# Altium PCB PCB_Yagmur-Sensoru_2025-10-18.pcbdoc
Units mil, origin at the board's own origin, x right, y up, seen from the top; angles counter-clockwise.
Board outline 1548 x 1517 mil, 2 copper layers (Top Layer, Bottom Layer); 8 components, 9 nets, 19 pads, 2 vias.
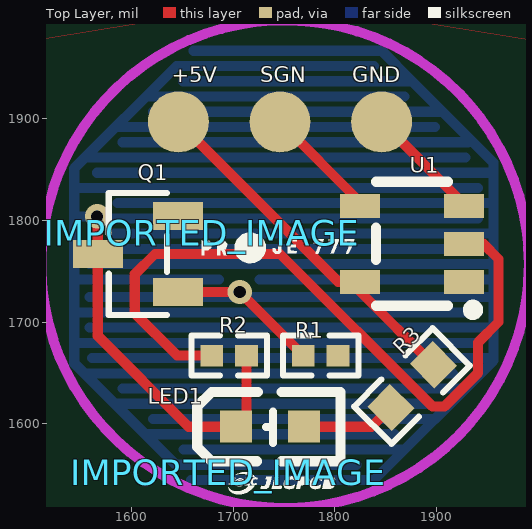
[diagram p0: Top Layer view]
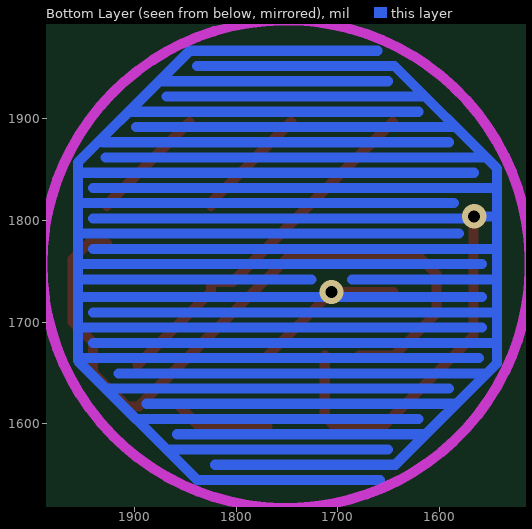
[diagram p1: Bottom Layer view, seen from below]

## Layer stack, top to bottom
Top Layer: signal copper (thickness not stored)
Dielectric: dielectric 12.6, FR-4, Dk 4.8
Bottom Layer: signal copper (thickness not stored)

## Board outline
2548,1000 1000,1000 1000,2517 2548,2517

## Components (designator, comment, footprint, x,y, rotation, side; value= is the part's Value field where it differs from the comment)
IMPORTED_IMAGE "IMPORTED_IMAGE" IMPORTED_IMAGE 1668.94,1787.89 r0 top
IMPORTED_IMAGE "IMPORTED_IMAGE" IMPORTED_IMAGE 1695.18,1552.28 r0 top
LED1 "19-217/BHC-ZL1M2RY/3T" LED0603-R-RD_BLUE 1736,1597 r0 top
Q1 "2N7002" SOT-23-3_L2.9-W1.3-P1.90-LS2.4-BR 1606,1767 r0 top
R1 "10kΩ" R0402 1786,1667 r180 top
R2 "1kΩ" R0402 1696,1667 r0 top
R3 "430Ω" R0603 1876,1637 r45 top
U1 "SN74AHC1G04DBVR" SOT-23-5_L3.0-W1.7-P0.95-LS2.8-BR 1876,1777 r0 top

## Footprints (in the part's own frame and the unit in brackets; to place one, negate y for a bottom-side part, rotate by r counter-clockwise, add the part's x,y. Pads: shape width x height; smd on the part's side, far side on the other; paste and mask are expansions set on the pad)
IMPORTED_IMAGE [mil]
  silkscreen extent 0,-30 150,0
LED0603-R-RD_BLUE [mm]
  rect 0.8x0.8 smd paste+0 mask+0.051: 1(0.851,0) 2(-0.851,0)
  silkscreen extent -1.82,-0.86 1.77,0.86
R0402 [mm]
  rect 0.566x0.54 smd paste-100 mask+0.051: 1(-0.433,0) 2(0.433,0)
  silkscreen extent -0.94,-0.5 0.94,0.5
R0603 [mil]
  rect 31.75x34.02 smd paste-3937.01 mask+2: 1(-29.65,0) 2(29.65,0)
  silkscreen extent -55,-26 55,26
SOT-23-3_L2.9-W1.3-P1.90-LS2.4-BR [mm]
  rect 1.25x0.7 smd paste+0 mask+0.051: 1(1,-0.95) 2(1,0.95) 3(-1,0)
  silkscreen extent -0.73,-1.53 0.73,1.53
SOT-23-5_L3.0-W1.7-P0.95-LS2.8-BR [mm]
  rect 1x0.6 smd paste+0 mask+0.051: 1(1.3,-0.95) 2(1.3,0) 3(1.3,0.95) 4(-1.3,0.95) 5(-1.3,-0.95)
  silkscreen extent -0.9,-1.78 1.65,1.55

## Free pads (board coordinates)
  round 60 smd paste+4 mask+4: 1(1646,1897) 2(1746,1897) 2(1846,1897)

## Via types
v1: diameter 24, hole 12, Top Layer to Bottom Layer, tented both sides, 2 vias

## Nets (pads, with @x,y where several pads share a name; then routed paths per layer and width w, separated by ;. In a path a pad name is that pad's centre, name@x,y a point inside that pad or via, vN(x,y) a via of type N, cw(c..) or ccw(c..) an arc to the next point about the centre after c; other vN are vias at no path point)
+5V: pad.1 R3.2 U1.5 | length 355.5
  Top Layer w10: pad.1 1803.4,1739.6 U1.5 1824.82,1730.13 R3.2
GND: pad.2@1846,1897 Q1.2 R1.1 U1.3 | length 116.2
  Top Layer w10: pad.2@1846,1897 1927.18,1815.82 U1.3
LED1_1: LED1.1 R3.1 | length 93.4
  Top Layer w10: LED1.1 1836,1597 R3.1
Q1_1: Q1.1 R1.2 | length 5667
  Top Layer w10: Q1.1 v1(1706.36,1729.6) R1.2
  Bottom Layer w10: 1558.5,1694.5 1956,1694.5 ; 1558.5,1724.5 1956,1724.5 1956,1857 1876,1937 ; 1558.5,1757 1956,1757 ; 1561,1664.5 1956,1664.5 ; 1566,1847 1955,1847 ; 1581,1787 1956,1787 ; 1586,1817 1956,1817 ; 1591,1634.5 1926,1634.5 ; 1591,1877 1931,1877 ; 1621,1604.5 1896,1604.5 ; 1621,1907 1904.69,1907 ; 1650.6,1937 1876,1937 ; 1651,1574.5 1866,1574.5 ; 1658.5,1544.5 1838.5,1544.5 1956,1662 1956,1729.6 ; 1661,1967 1846,1967 1876,1937 ; v1@1706.4,1724.5 v1(1706.36,1729.6) ; 1726,1742 1956,1742
Q1_3: LED1.2 Q1.3 R2.2 | length 5190
  Top Layer w10: v1(1566,1804) 1566.63,1803.37 Q1.3 ; Q1.3 1566.6,1686.4 1656,1597 LED1.2 1713.04,1607.54 R2.2
  Bottom Layer w10: 1543.5,1679.5 1941,1679.5 ; 1543.5,1709.5 1941,1709.5 ; 1546,1742 1686,1742 ; 1546,1772 1941,1772 ; 1546,1832 1941,1832 ; 1553.5,1649.5 1916,1649.5 ; 1556,1862 1928.5,1862 ; v1@1566,1802 1941,1802 ; v1(1566,1804) 1543.5,1804 ; 1586,1619.5 1888.5,1619.5 ; 1586,1892 1898.5,1892 ; 1608.43,1916.13 1614.3,1922 1868.5,1922 ; 1616,1589.5 1858.5,1589.5 ; 1821,1559.5 1643.5,1559.5 1543.5,1659.5 1543.5,1804 ; 1838.5,1952 1644.3,1952 1543.5,1851.2 1543.5,1804
S$623: 
SIGNAL: pad.2@1746,1897 U1.4 | length 115.2
  Top Layer w10: pad.2@1746,1897 1824.82,1818.18 U1.4
U1_1: U1.1
U1_2: R2.1 U1.2 | length 713.9
  Top Layer w10: R2.1 1644.8,1667 1603,1708.8 1603,1747 1623,1767 1746,1767 1896,1617 1908,1617 1941,1650 1941,1680 1961,1700 1961,1762 1946,1777 U1.2

## Polygon pours and split planes (outlines as drawn)
GND on Top Layer (solid): 1990,1978 1748.5,2017 1509,1978 1500,1969 1500,1530 1530,1500 2027,1500 2048,1521

## Keep-outs
Keep-Out Layer:
  circle w10 net S$623: c1751,1757 r240

## Silkscreen, mask and mechanical layers (free items; w line width, h text height)
Top Overlay:
  text "+5V" at 1639.7,1935.96 h15
  text "SGN" at 1726.32,1935.96 h15
  text "GND" at 1816.87,1935.96 h15
Bottom Solder:
  lines w10 net Q1_1: 1558.48,1694.44 1955.98,1694.44 ; 1558.48,1724.44 1955.98,1724.44 1955.98,1856.94 1875.98,1936.94 ; 1558.48,1756.94 1955.98,1756.94 ; 1560.98,1664.44 1955.98,1664.44 ; 1565.98,1846.94 1954.98,1846.94 ; 1580.98,1786.94 1955.98,1786.94 ; 1585.98,1816.94 1955.98,1816.94 ; 1590.98,1634.44 1925.98,1634.44 ; 1590.98,1876.94 1930.98,1876.94 ; 1620.98,1604.44 1895.98,1604.44 ; 1620.98,1906.94 1904.67,1906.94 ; 1650.59,1936.94 1875.98,1936.94 ; 1650.98,1574.44 1865.98,1574.44 ; 1658.48,1544.44 1838.48,1544.44 1955.98,1661.94 1955.98,1729.54 ; 1660.98,1966.94 1845.98,1966.94 1875.98,1936.94 ; 1706.38,1724.44 1706.38,1729.54 ; 1725.98,1741.94 1955.98,1741.94
  lines w10 net Q1_3: 1543.52,1679.51 1941.02,1679.51 ; 1543.52,1709.51 1941.02,1709.51 ; 1546.02,1742.01 1686.02,1742.01 ; 1546.02,1772.01 1941.02,1772.01 ; 1546.02,1832.01 1941.02,1832.01 ; 1553.52,1649.51 1916.02,1649.51 ; 1556.02,1862.01 1928.52,1862.01 ; 1566.02,1802.01 1941.02,1802.01 ; 1566.02,1804.01 1543.52,1804.01 ; 1586.02,1619.51 1888.52,1619.51 ; 1586.02,1892.01 1898.52,1892.01 ; 1608.44,1916.14 1614.32,1922.01 1868.52,1922.01 ; 1616.02,1589.51 1858.52,1589.51 ; 1821.02,1559.51 1643.52,1559.51 1543.52,1659.51 1543.52,1804.01 ; 1838.52,1952.01 1644.32,1952.01 1543.52,1851.21 1543.52,1804.01